# EAGLE board line follower (EAGLE 9.6.2)
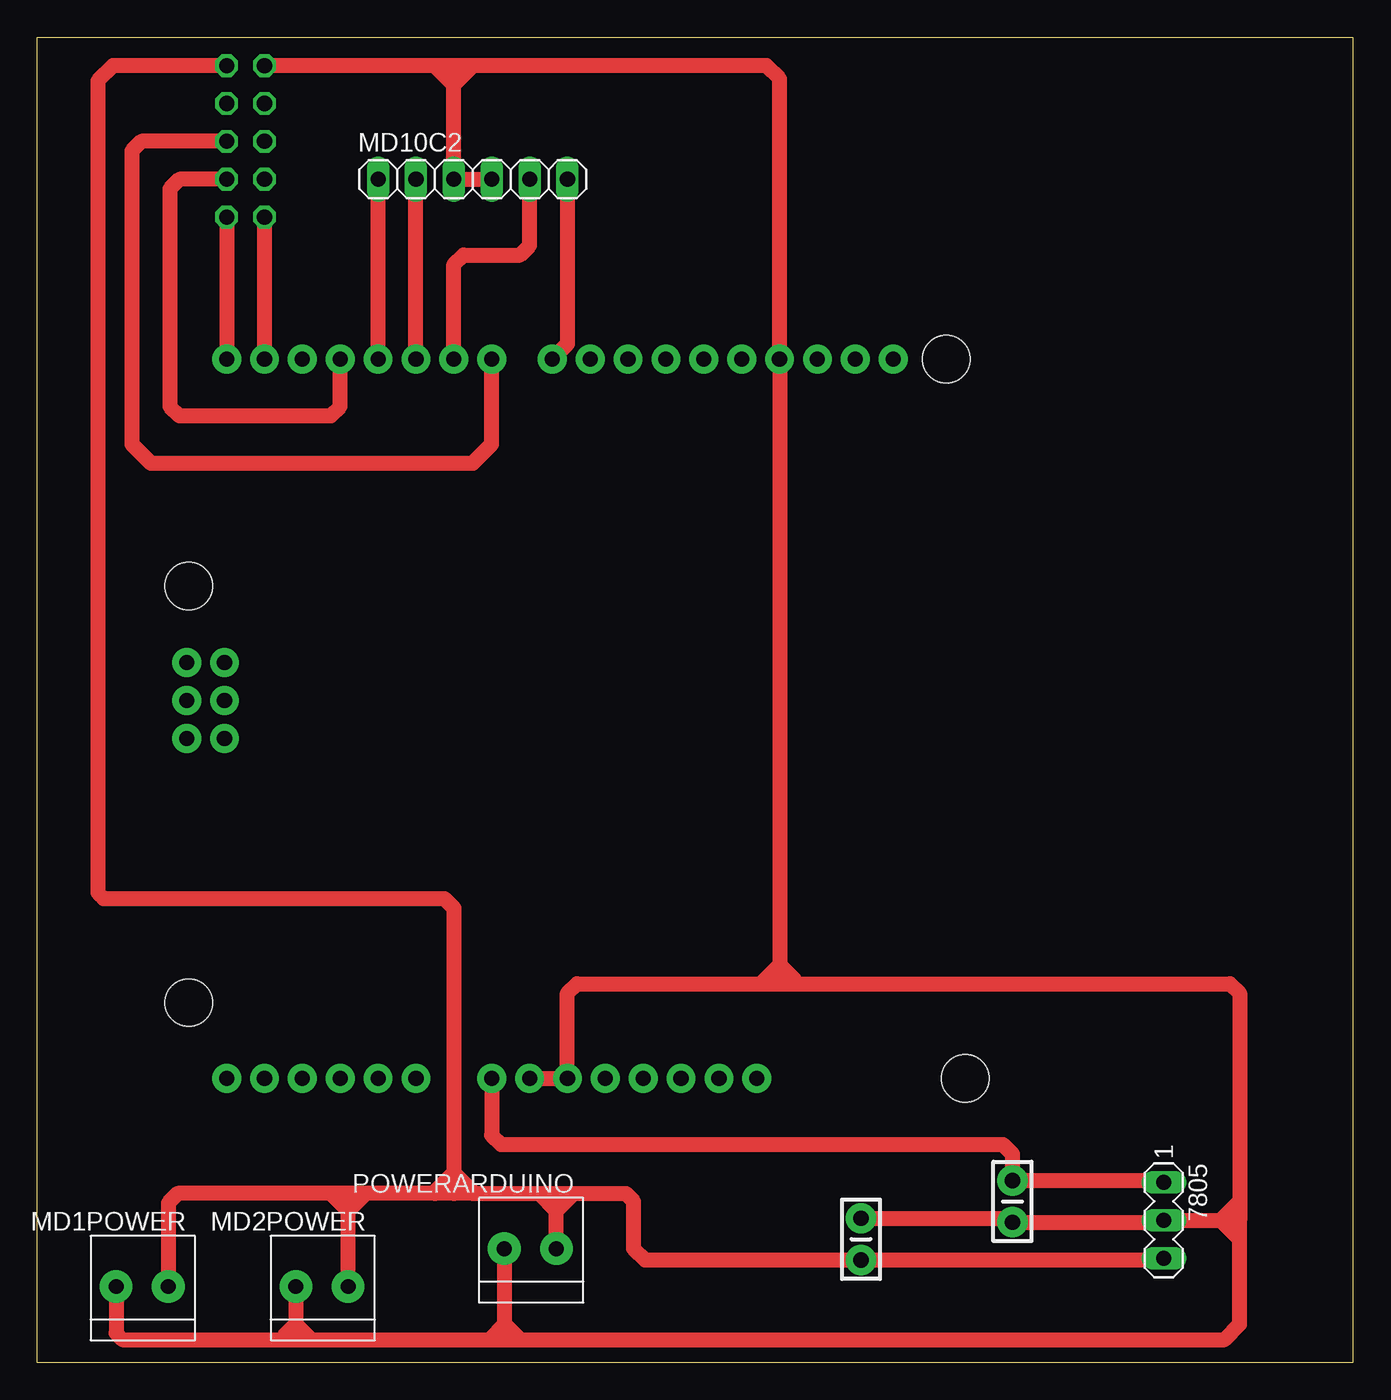
[diagram p0: board, top side]
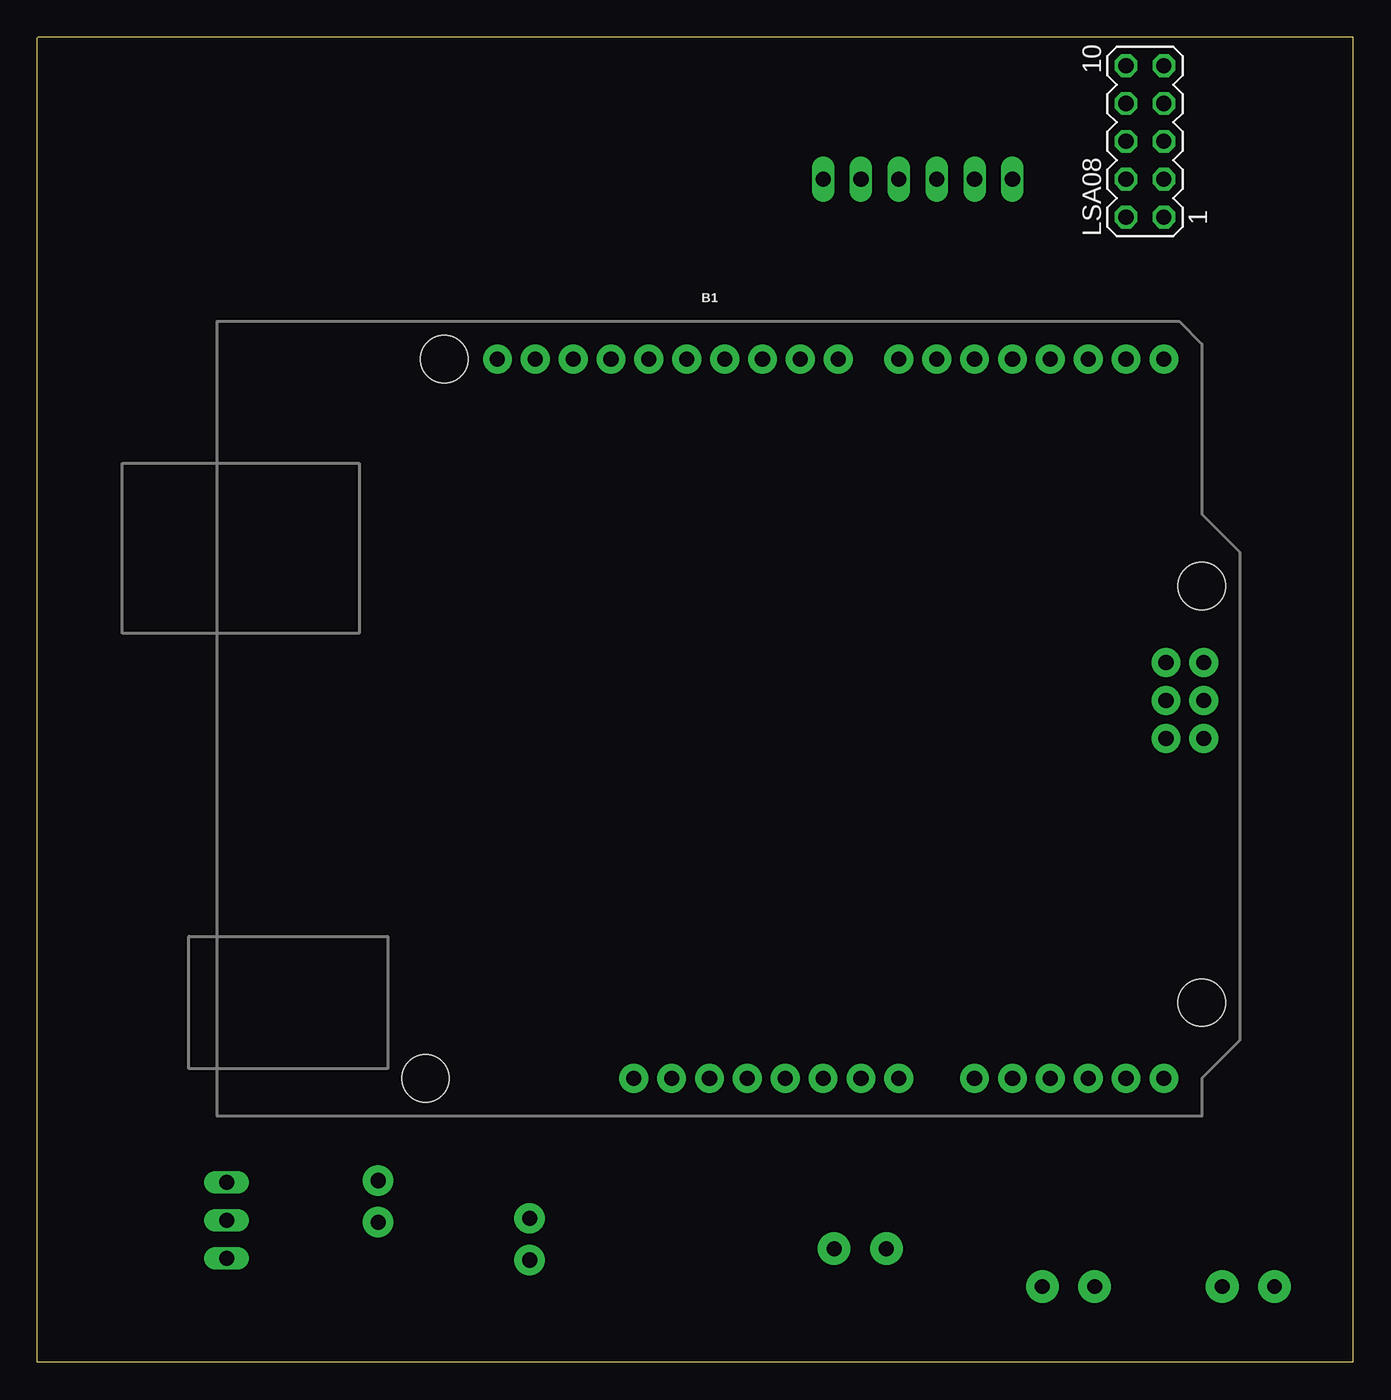
[diagram p1: board, bottom side, seen from below]

Size 88.27 x 88.9 mm. Coordinates in mm from the lower left corner, seen from the top.
Outline: 88.25,0 0,0 0,88.25
Outline: 0,88.9 88.25,88.9
Outline: 88.27,0 88.27,88.25
Outline: 0,0.64 0,88.88
Outline: 88.27,0.64 88.27,88.88
Copper layers (1*16): Top 0.035mm / dielectric 1.5mm / Bottom 0.035mm
Design rules "default": minimum track width 6mil, minimum drill 0.35mm, track to track 6mil, track to pad 6mil, pad to pad 6mil, via to via 6mil, smd to smd 6mil, copper to edge 40mil, drill to drill 6mil, minimum pad ring 10mil, minimum via ring 8mil, stop-mask expansion 4mil, vias tented up to drill 0mil, thermal gap 10mil

## Footprints (pad centres in the part's own frame; a part is rotated, then mirrored left to right if it is on the bottom)
MA03-1 = drill 1.016 long: 1 -2.54,0; 2 0,0; 3 2.54,0
ARDUINO_R3 = drill 1.016 pad 1.93: 3.3V 2.54,-24.13; 5V 5.08,-24.13; A0 17.78,-24.13; A1 20.32,-24.13; A2 22.86,-24.13; A3 25.4,-24.13; A4 27.94,-24.13; A5 30.48,-24.13; AREF -9.144,24.13; D0 30.48,24.13; D1 27.94,24.13; D2 25.4,24.13; D3 22.86,24.13; D4 20.32,24.13; D5 17.78,24.13; D6 15.24,24.13; D7 12.7,24.13; D8 8.636,24.13; D9 6.096,24.13; D10 3.556,24.13; D11 1.016,24.13; D12 -1.524,24.13; D13 -4.064,24.13; GND@1 7.62,-24.13; GND@2 10.16,-24.13; GND@3 -6.604,24.13; GND@4 33.16,-1.32; IOREF -2.54,-24.13; MISO 30.62,3.76; MOSI 33.16,1.22; NC -5.08,-24.13; RESET@1 0,-24.13; RESET@2 30.62,-1.32; SCK 30.62,1.22; SCL -14.224,24.13; SDA -11.684,24.13; VCC 33.16,3.76; VIN 12.7,-24.13 | hole 3.175: -17.78,24.13; 33.02,8.89; 33.02,-19.05; -19.05,-24.13
CAP-PTH-SMALL-KIT = drill 1.016 pad 2.032: 1 -1.397,0; 2 1.397,0
MA05-2 = drill 1.016 octagon: 1 -5.08,-1.27; 2 -5.08,1.27; 3 -2.54,-1.27; 4 -2.54,1.27; 5 0,-1.27; 6 0,1.27; 7 2.54,-1.27; 8 2.54,1.27; 9 5.08,-1.27; 10 5.08,1.27
1X2-3.5MM = drill 1 pad 2.184: 1 1.8,0; 2 -1.7,0
1X06 = drill 1.016 long: 1 -6.35,0; 2 -3.81,0; 3 -1.27,0; 4 1.27,0; 5 3.81,0; 6 6.35,0

## Placement (x,y rotation side)
7805  [MA03-1]  75.56,9.53 270 top
B1  ARDUINO_UNO_R3  [ARDUINO_R3]  43.18,43.18 0 bottom
C1  0.1uF  [CAP-PTH-SMALL-KIT]  55.24,8.26 90 top
C2  0.1uF  [CAP-PTH-SMALL-KIT]  65.41,10.79 90 top
LSA08  [MA05-2]  13.97,81.92 90 bottom
MD1POWER  1X2-3.5MM  [1X2-3.5MM]  6.99,5.08 0 top
MD2POWER  1X2-3.5MM  [1X2-3.5MM]  19.05,5.08 0 top
MD10C2  [1X06]  29.21,79.38 0 top
POWERARDUINO  1X2-3.5MM  [1X2-3.5MM]  33.02,7.62 0 top

## Library data of the parts
7805 LSA08 = con-lstb; OC_FARNELL: unknown; OC_NEWARK: unknown
B1 = SparkFun-Boards
C1 C2 = SparkFun-Capacitors; PROD_ID: CAP-08370
MD1POWER MD2POWER POWERARDUINO = adafruit
MD10C2 = pinhead

## Nets
2: B1.D2
3: B1.D3 LSA08.3
7: B1.D7 LSA08.5
9: B1.D9
10: B1.D10
11: B1.D11
12: B1.D12
DIR1: B1.D4 MD10C2.1
DIR2: B1.D8 MD10C2.6
GND: 7805.2 B1.GND@1 B1.GND@2 B1.GND@3 C1.2 C2.1 LSA08.10 MD1POWER.2 MD2POWER.2 MD10C2.3 MD10C2.4 POWERARDUINO.2
PWM1: B1.D5 MD10C2.2
PWM2: B1.D6 MD10C2.5
RX: B1.D1 LSA08.2
TX: B1.D0 LSA08.1
VIN: 7805.3 C1.1 LSA08.9 MD1POWER.1 MD2POWER.1 POWERARDUINO.1
VOUT: 7805.1 B1.VIN C2.2

## Tracks (layer width: path | path; a pad name or v marks a point on that pad's centre or on a via)
3
  Top 1.016: LSA08.3 9.53,79.38 8.89,78.74 8.89,64.14 9.53,63.5 19.68,63.5 20.32,64.14 B1.D3
7
  Top 1.016: LSA08.5 6.99,81.92 6.35,81.28 6.35,61.59 7.62,60.33 29.21,60.33 30.48,61.59 B1.D7
DIR1
  Top 1.016: B1.D4 MD10C2.1
DIR2
  Top 1.016: MD10C2.6 35.56,68.33 B1.D8
GND
  Top 1.016: MD10C2.4 MD10C2.3 27.94,85.72 | 29.21,87 48.9,87 49.78,86.11 B1.GND@3 49.78,26.67 | 29.21,87 27.94,87 | 27.94,87 26.67,87 | 26.67,87 LSA08.10 | B1.GND@2 B1.GND@1 35.56,24.77 36.2,25.4 48.51,25.4 | 49.78,25.4 49.78,26.67 | 48.51,25.4 49.78,25.4 | C1.2 65.15,9.65 C2.1 75.44,9.4 7805.2 79.38,9.53 | 80.64,10.79 80.64,24.77 80.01,25.4 50.8,25.4 | 80.64,10.79 80.64,9.53 | 49.78,25.4 50.8,25.4 | 49.78,26.67 48.51,25.4 | 49.78,26.67 50.8,25.65 50.8,25.4 | 31.11,1.52 32.38,1.52 | 32.38,1.52 79.63,1.52 80.64,2.54 80.64,8.26 | 80.64,8.26 80.64,9.53 | 80.64,9.53 79.38,9.53 | 79.38,9.53 80.64,8.26 | 79.38,9.53 80.64,10.79 | 27.94,85.72 27.94,87 | 29.21,87 27.94,85.72 | 27.94,85.72 26.67,87 | 17.78,1.52 18.37,1.52 | 18.37,1.52 30.3,1.52 | 30.3,1.52 31.11,1.52 | MD1POWER.2 5.29,1.95 5.71,1.52 16.51,1.52 | 16.51,1.52 17.78,1.52 | 17.78,1.52 17.35,1.95 17.35,2.54 | MD2POWER.2 17.35,2.54 | 17.35,2.54 16.51,1.7 16.51,1.52 | 17.35,2.54 18.37,1.52 | POWERARDUINO.2 31.32,2.54 | 31.32,2.54 31.32,1.73 31.11,1.52 | 31.32,2.54 30.3,1.52 | 31.32,2.54 31.37,2.54 32.38,1.52
PWM1
  Top 1.016: B1.D5 MD10C2.2
PWM2
  Top 1.016: B1.D6 27.94,73.66 28.57,74.3 32.38,74.3 33.02,74.93 MD10C2.5
RX
  Top 1.016: LSA08.2 B1.D1
TX
  Top 1.016: LSA08.1 B1.D0
VIN
  Top 1.016: LSA08.9 5.08,87 4.06,85.98 4.06,31.5 4.45,31.11 27.3,31.11 27.94,30.48 27.94,12.7 | 7805.3 75.44,6.86 C1.1 40.77,6.86 40.01,7.62 40.01,10.79 39.48,11.32 35.98,11.32 | 27.94,11.32 26.67,11.32 | 26.67,11.32 22.02,11.32 | 22.02,11.32 20.95,11.32 | 20.95,11.32 19.68,11.32 | 19.68,11.32 9.42,11.32 8.79,10.69 MD1POWER.1 | 27.94,12.7 27.94,11.32 | MD2POWER.1 20.85,10.16 | 20.85,10.16 20.85,11.22 20.95,11.32 | 20.85,10.16 22.02,11.32 | 20.85,10.16 19.68,11.32 | 29.21,11.32 27.94,11.32 | 27.94,12.7 26.67,11.43 26.67,11.32 | 27.94,12.7 29.21,11.43 29.21,11.32 | 29.21,11.32 33.66,11.32 | 33.66,11.32 34.92,11.32 | 34.92,11.32 35.98,11.32 | POWERARDUINO.1 34.82,10.16 | 34.82,10.16 34.82,11.22 34.92,11.32 | 34.82,10.16 35.98,11.32 | 34.82,10.16 33.66,11.32
VOUT
  Top 1.016: B1.VIN 30.48,15.24 31.11,14.61 64.77,14.61 65.41,13.97 C2.2 75.44,12.19 7805.1